# Altium PCB BH1750_VE6070-RS485.pcbdoc
Units mm, origin at the board's own origin, x right, y up, seen from the top; angles counter-clockwise.
Board outline 106.81 x 95.88 mm, 2 copper layers (Top Layer, Bottom Layer); 44 components, 46 nets, 133 pads, 69 vias.
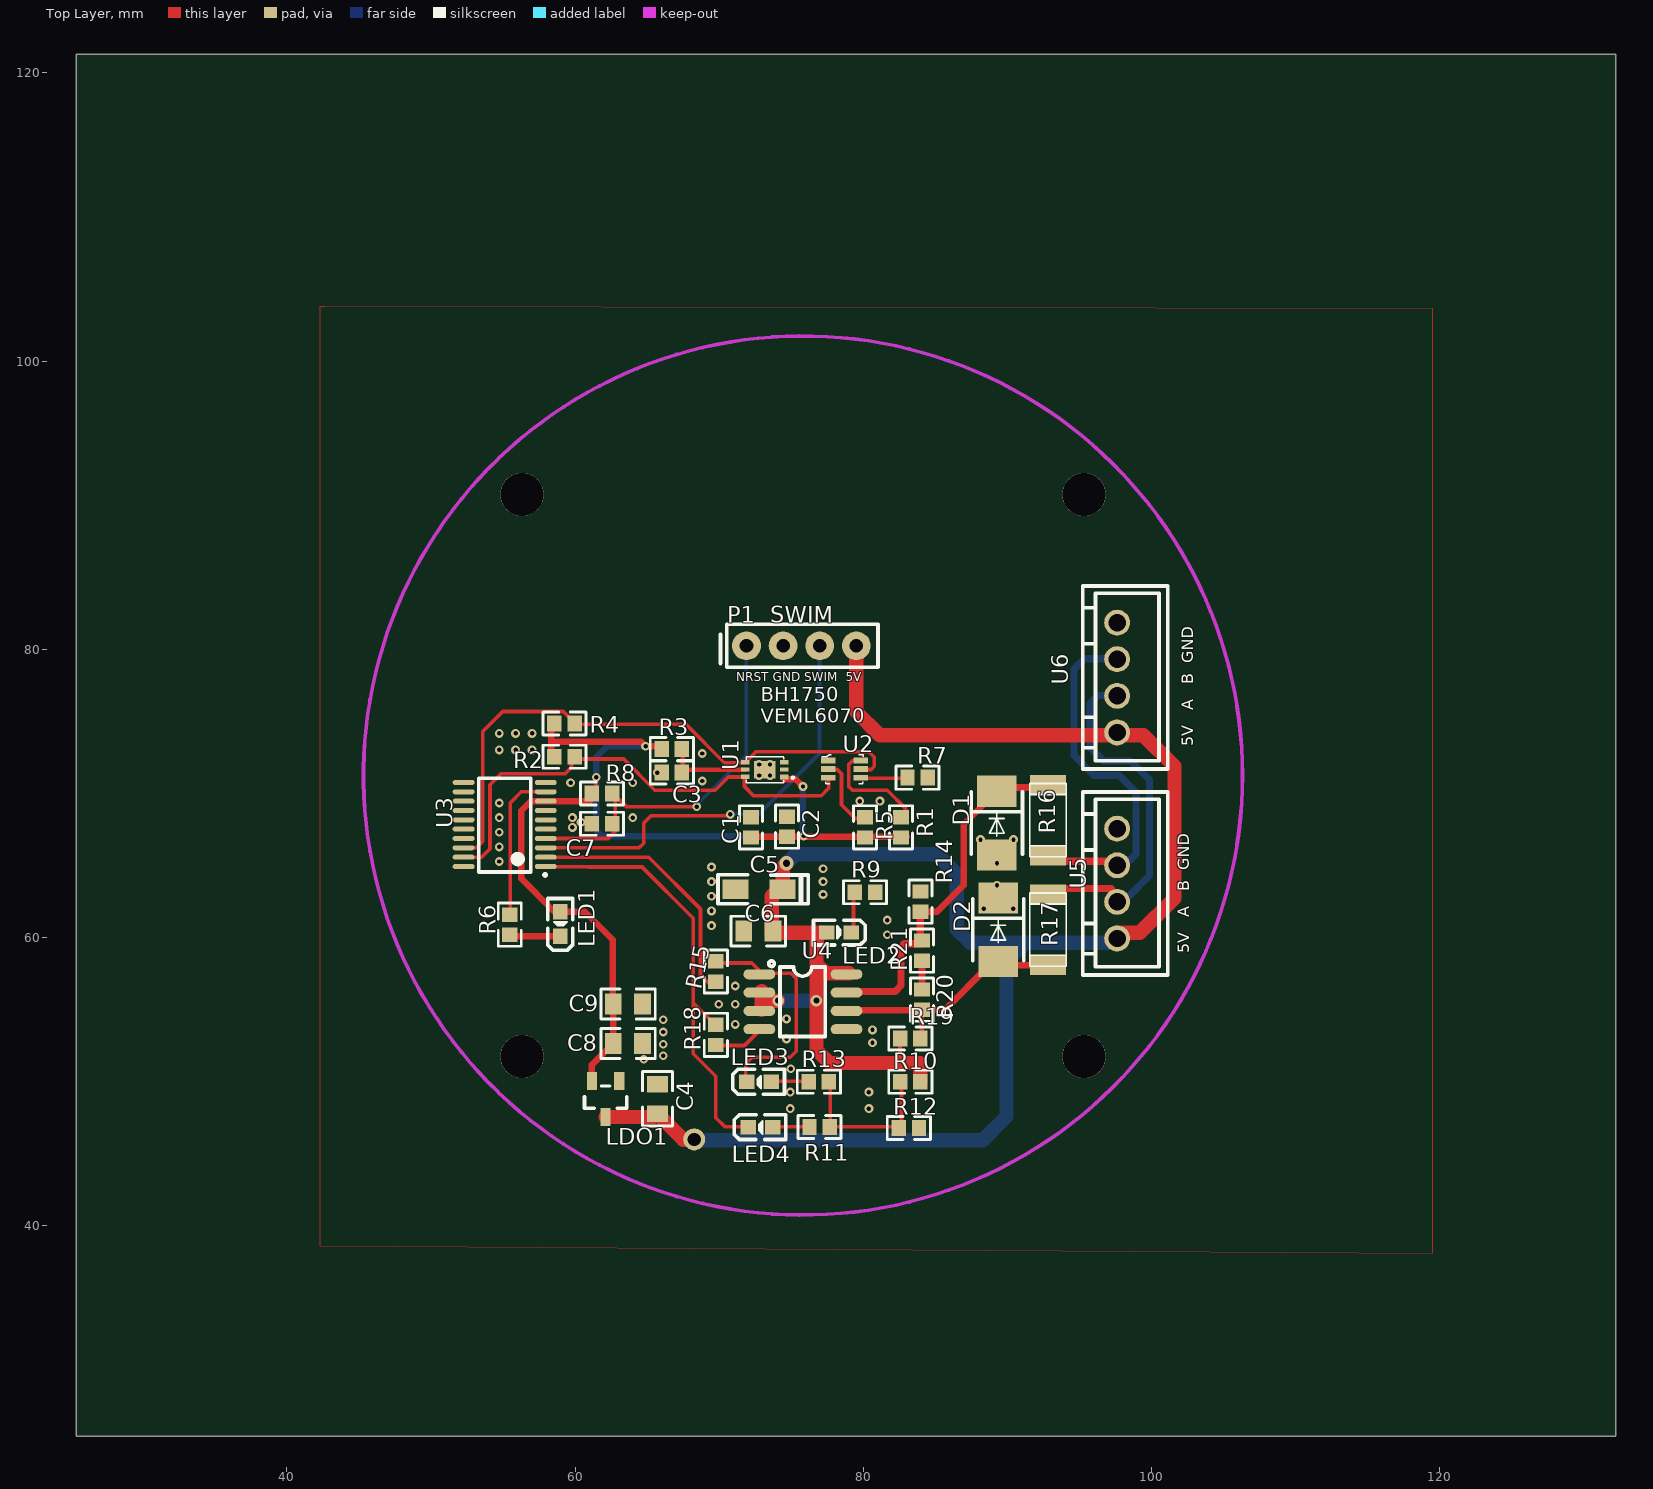
[diagram p0: Top Layer view]
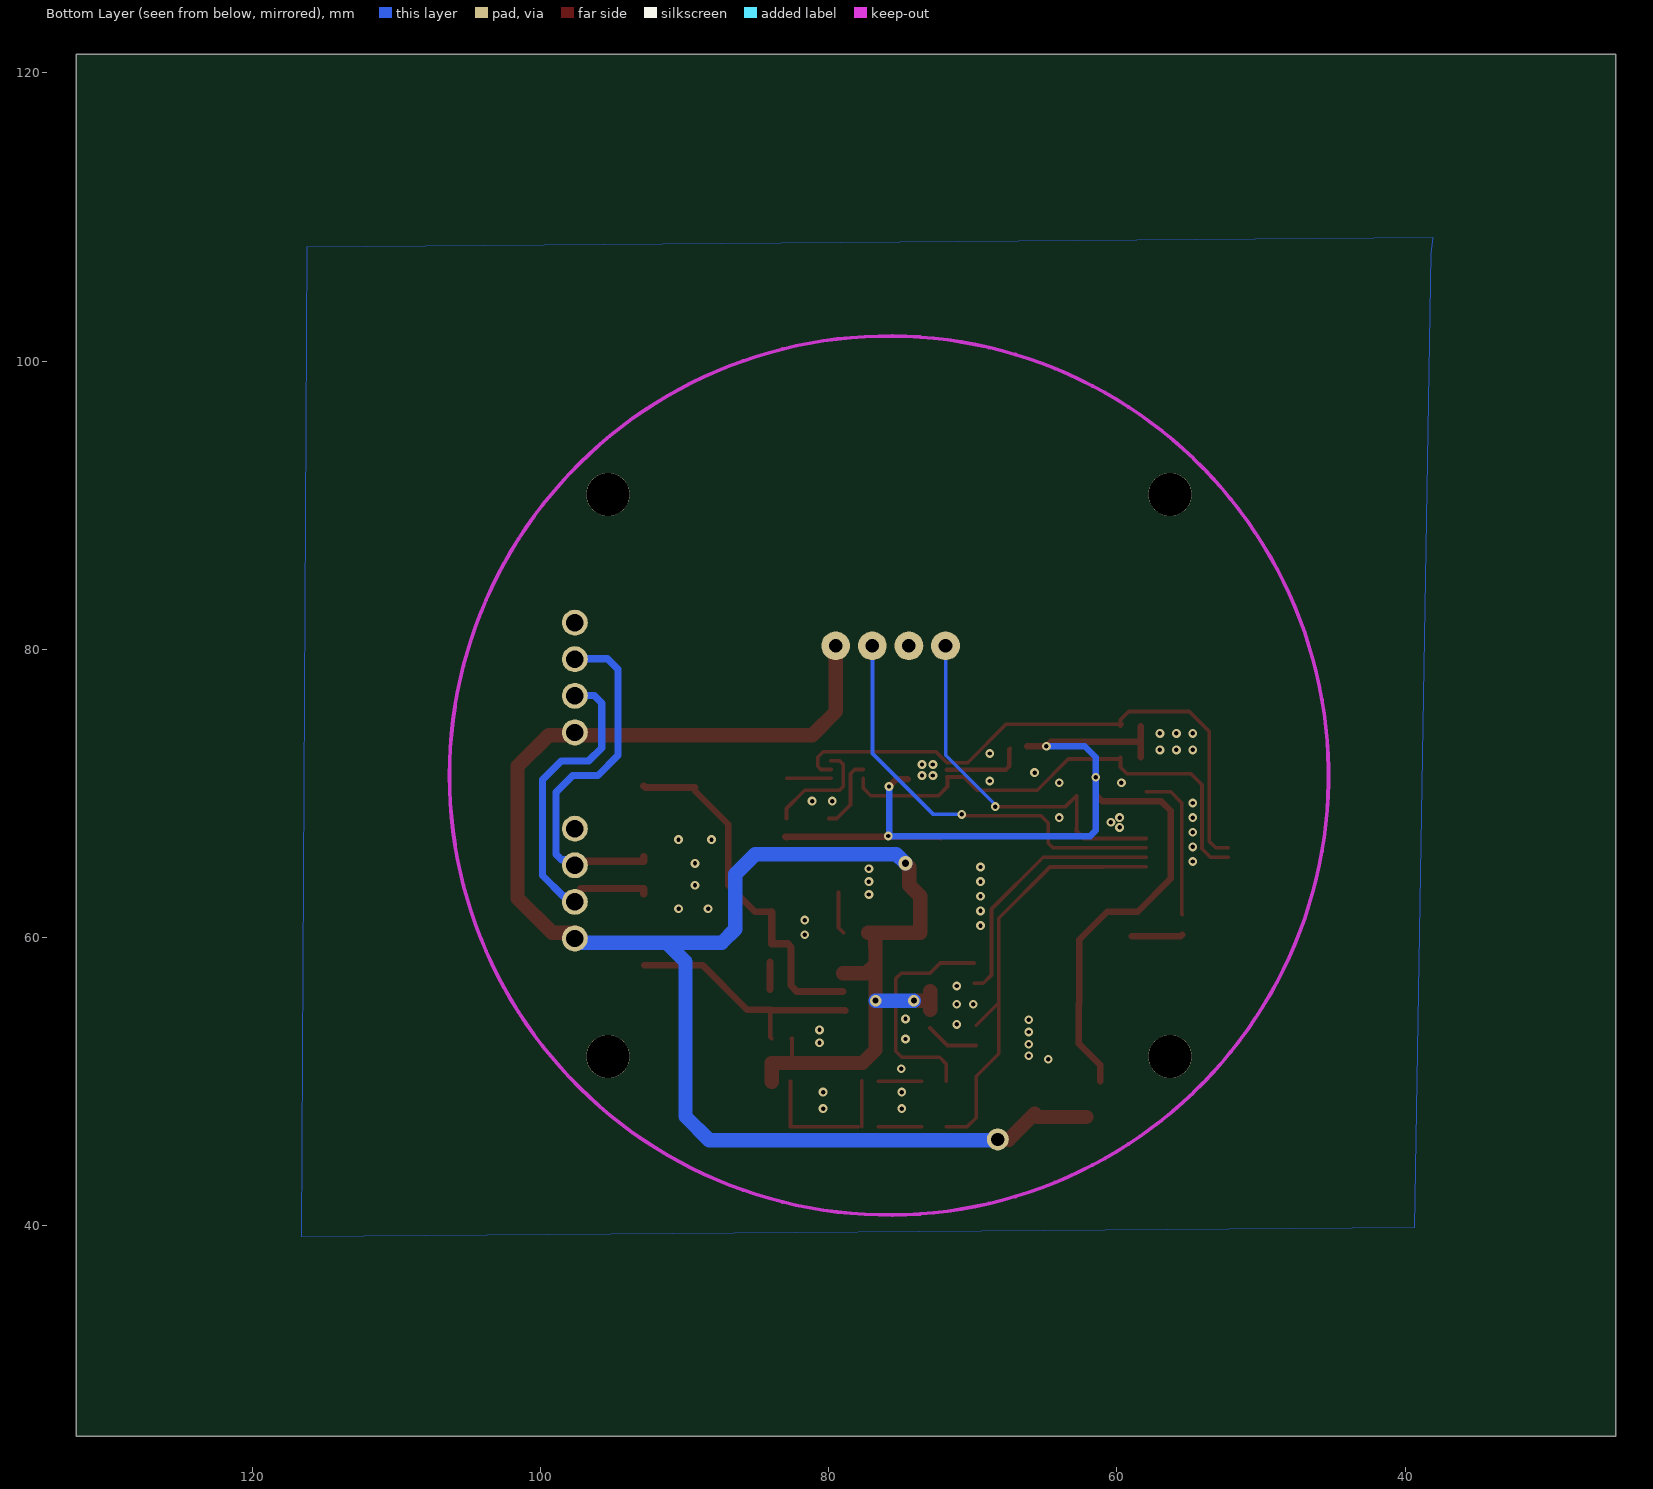
[diagram p1: Bottom Layer view, seen from below]

## Layer stack, top to bottom
Top Layer: signal copper (thickness not stored)
Dielectric: dielectric 0.32, FR-4, Dk 4.8
Bottom Layer: signal copper (thickness not stored)

## Board outline
132.207,25.4 25.4,25.4 25.4,121.285 132.207,121.285

## Components (designator, comment, footprint, x,y, rotation, side; value= is the part's Value field where it differs from the comment)
C1 "0.1uF" 0603 72.219,67.647 r90 top
C2 "10uF" 0603 74.719,67.697 r90 top
C3 "0.1uF" 0603 66.719,71.447 r180 top
C4 "1uF" 0805 65.719,48.797 r270 top
C5 "10uF" CASE-A_3216 72.769,63.347 r0 top
C6 "100nF" 0805 72.719,60.447 r0 top
C7 "100nF" 0603 61.869,67.897 r0 top
C8 "1uF" 0805 63.669,52.647 r180 top
C9 "100nF" 0805 63.669,55.397 r180 top
D1 "SMBJ6.8CA" SMB(DO-214AA) 89.269,67.947 r90 top
D2 "SMBJ6.8CA" SMB(DO-214AA) 89.369,60.547 r90 top
LDO1 "SC662K-3.3V" SOT-23(SOT-23-3) 62.119,48.797 r180 top
LED1 "19-213/Y2C-CQ2R2L/3T(CY)" LED-0603 58.969,60.947 r90 top
LED2 "19-217/GHC-YR1S2/3T" LED-0603 78.319,60.347 r180 top
LED3 "19-217/BHC-ZL1M2RY/3T" LED-0603 72.769,49.997 r0 top
LED4 "KT-0603R" LED-0603 72.869,46.847 r0 top
P1 "2.54mm/4p" "4P 2.54" 79.519,80.247 r180 top
R1 "10r" 0603 82.619,67.647 r270 top
R2 "4.7K" 0603 59.269,72.547 r180 top
R3 "1K" 0603 66.719,73.097 r0 top
R4 "4.7K" 0603 59.269,74.847 r180 top
R5 "10K" 0603 80.119,67.647 r270 top
R6 "1K" 0603 55.469,60.897 r270 top
R7 "270K" 0603 83.769,71.097 r0 top
R8 "1K" 0603 61.869,69.997 r180 top
R9 "1K" 0603 80.119,63.147 r180 top
R10 "470" 0603 83.269,49.997 r0 top
R11 "4.7K" 0603 76.969,46.847 r180 top
R12 "2K" 0603 83.169,46.797 r0 top
R13 "4.7K" 0603 76.919,49.997 r180 top
R14 "4.7K" 0603 83.969,62.497 r270 top
R15 "22" 0603 69.769,57.647 r90 top
R16 "10" 2010 92.819,68.147 r90 top
R17 "10" 2010 92.819,60.547 r270 top
R18 "22" 0603 69.769,53.247 r270 top
R19 "4.7K" 0603 83.269,52.997 r0 top
R20 "120" 0603 84.069,55.697 r270 top
R21 "NC" 0603 84.069,59.097 r90 top
U1 "BH1750FVI-TR" WSOF6I-7_L1.8-W2.6-H0.75-PITCH0.5-(EP)-BL 73.169,71.647 r90 top
U2 "VEML6070" 6SMD_MODULE 77.569,72.297 r0 top
U3 "STM8L051F3_JX" TSSOP-20_JX 55.119,67.847 r90 top
U4 "MAX13487EESA" SOIC-8_150MIL 75.819,55.547 r0 top
U5 "A2501WV-04P2" A2501WV-4P 97.619,63.747 r270 top
U6 "A2501WV-04P2" A2501WV-4P 97.619,78.047 r270 top

## Footprints (in the part's own frame and the unit in brackets; to place one, negate y for a bottom-side part, rotate by r counter-clockwise, add the part's x,y. Pads: shape width x height; smd on the part's side, far side on the other; paste and mask are expansions set on the pad)
"4P 2.54" [mm]
  round 2 hole 0.95: 1(0,0) 2(2.54,0) 3(5.08,0) 4(7.62,0)
  silkscreen extent -1.5,-1.5 9,1.5
6SMD_MODULE [mm]
  rect 1x0.4 smd: 1(0,0) 2(0,-0.6) 3(0,-1.2) 4(2.25,-1.2) 5(2.25,-0.6) 6(2.25,0)
  silkscreen extent -0.44,-1.62 2.42,0.4
0603 [mm]
  rect 1x1.1 smd: 1(-0.7,0) 2(0.7,0)
  silkscreen extent -1.5,-0.8 1.5,0.8
0805 [mm]
  rect 1.16x1.45 smd: 1(-1.016,0) 2(1.016,0)
  silkscreen extent -1.9,-1.03 1.87,1.04
2010 [mil]
  rect 55.1x98.4 smd: 1(-96.5,0) 2(96.5,0)
  silkscreen extent -100,-50 100,50
A2501WV-4P [mm]
  round 1.8 hole 1.2: 1(3.809,0.001) 2(1.269,0.001) 3(-1.271,0.001) 4(-3.809,-0.001)
  silkscreen extent -6.35,-2.38 6.35,3.5
CASE-A_3216 [mil]
  rect 71.5x53.5 smd: 1(64.5,0) 2(-64.5,0)
  silkscreen extent -112,-39 134,40
LED-0603 [mil]
  rect 43x39 smd: 1(33.5,0) 2(-33.5,0)
  silkscreen extent -72,-34 70,34
SMB(DO-214AA) [mil]
  rect 85x108 smd: 1(-87,0) 2(87,0)
  silkscreen extent -85,-70 85,70
SOIC-8_150MIL [mm]
  oval 2.2x0.7 smd: 1(-3.023,1.905) 2(-3.023,0.635) 3(-3.023,-0.635) 4(-3.023,-1.905) 5(3.023,-1.905) 6(3.023,-0.635) 7(3.023,0.635) 8(3.023,1.905)
  silkscreen extent -2.37,-2.41 1.55,2.83
SOT-23(SOT-23-3) [mm]
  rect 0.7x1.25 smd: 1(-0.95,-1.25) 2(0.95,-1.25) 3(0,1.25)
  silkscreen extent -1.46,-0.9 1.46,0.65
TSSOP-20_JX [mm]
  oval 0.35x1.52 smd: 1(-2.921,-2.85) 2(-2.271,-2.85) 3(-1.621,-2.85) 4(-0.97,-2.85) 5(-0.32,-2.85) 6(0.32,-2.85) 7(0.97,-2.85) 8(1.621,-2.85) 9(2.271,-2.85) 10(2.921,-2.85) 11(2.921,2.85) 12(2.268,2.85) 13(1.621,2.85) 14(0.97,2.85) 15(0.323,2.85) 16(-0.318,2.85) 17(-0.968,2.85) 18(-1.615,2.85) 19(-2.266,2.85) 20(-2.921,2.85)
  silkscreen extent -3.6,-2.9 3.2,1.8
WSOF6I-7_L1.8-W2.6-H0.75-PITCH0.5-(EP)-BL [mm]
  rect 0.351x0.599 smd: 1(-0.511,-1.35)
  rect 0.3x0.6 smd: 2(0.01,-1.35) 3(0.511,-1.35)
  rect 0.3x0.599 smd: 4(0.51,1.35) 5(0.01,1.35) 6(-0.49,1.35)
  rect 1.2x1.5 smd: 7(0,0)
  silkscreen extent -0.9,-1.99 0.9,1.3

## Free pads (board coordinates)
  round 1.524 hole 0.914: 1(68.269,45.997)
  round 3 hole 3 unplated: ""(56.319,51.747) ""(56.319,90.747) ""(95.319,51.747) ""(95.319,90.747)

## Via types
v1: diameter 0.612, hole 0.305, Top Layer to Bottom Layer, 60 vias
v2: diameter 0.61, hole 0.305, Top Layer to Bottom Layer, 6 vias
v3: diameter 0.8, hole 0.4, Top Layer to Bottom Layer, 2 vias
v4: diameter 1, hole 0.5, Top Layer to Bottom Layer, 1 vias

## Nets (pads, with @x,y where several pads share a name; then routed paths per layer and width w, separated by ;. In a path a pad name is that pad's centre, name@x,y a point inside that pad or via, vN(x,y) a via of type N, cw(c..) or ccw(c..) an arc to the next point about the centre after c; other vN are vias at no path point)
3.3V: C1.1 C2.1 C8.2 C9.2 LDO1.2 LED1.1 R1.2 R2.2 R3.1 R4.2 R5.2 R8.2 U1.1 U3.8 | length 79.6
  Top Layer w0.254: R8.2@61.403,69.85 61.468,69.915 v2(61.468,71.12)
  Top Layer w0.45: U3.8 56.939,69.466 56.269,68.796 56.269,64.097 58.567,61.798 LED1.1 60.668,61.798 62.619,59.847 62.619,55.431 C9.2 C8.2 61.169,51.163 LDO1.2 ; U3.8 61.021,69.467 R8.2@61.403,69.85 ; R2.2@58.355,72.517 R4.2@58.355,74.676 ; 58.355,73.594 64.582,73.594 v2(64.897,73.279) R3.1@66.229,73.279 ; C1.1 72.219,66.997 83.005,66.997 R1.2@82.928,66.947 ; U1.1@74.502,70.993 75.311,70.993 v2(75.819,70.485)
  Bottom Layer w0.45: v2(64.897,73.279) 62.23,73.279 61.468,72.517 v2(61.468,71.12) 61.468,67.437 61.858,67.047 v2(75.869,67.047) 75.819,67.097 v2(75.819,70.485)
+5V: C4.2 C5.1 C6.2 LDO1.3 LED2.1 P1.1 pad.1 R10.2 R19.1 U4.2 U4.3 U4.8 U5.1 U6.1 | length 151.3
  Top Layer w0.254: U6.1 97.817,74.041 99.441,74.041
  Top Layer w0.3: 82.548,51.298 82.548,52.976 R19.1
  Top Layer w1: LDO1.3 65.485,47.547 C4.2 67.523,45.977 pad.1@68.119,45.977 ; U4.3@72.97,54.994 U4.2@72.97,56.264 ; 72.97,55.63 72.972,55.629 v3(74.088,55.629) ; v4(74.676,65.151) 74.409,64.884 74.409,63.627 73.66,62.878 73.66,60.325 LED2.1@77.254,60.325 ; v3(76.755,55.629) 76.754,52.2 77.658,51.298 83.969,51.297 83.969,51.147 R10.2 ; v3(76.755,55.629) 76.755,58.423 ; 76.762,60.325 76.754,58.169 77.389,57.534 U4.8@79.014,57.534 ; P1.1@79.502,80.137 79.502,75.692 81.153,74.041 98.697,74.041 ; U6.1@97.5,74.295 97.5,74.041 99.441,74.041 101.6,71.882 101.6,62.738 99.187,60.325 U5.1@97.536,60.325
  Bottom Layer w1: pad.1@68.118,45.977 68.156,45.938 88.29,45.938 89.941,47.589 89.941,58.318 91.277,59.654 ; v3(74.088,55.629) v3(76.755,55.629) ; v4(74.676,65.151) 75.311,65.786 82.423,65.786 85.09,65.786 86.487,64.389 86.487,60.579 87.412,59.654 91.277,59.654 ; U5.1@97.889,59.654 91.277,59.654
GND: C1.2 C2.2 C3.2 C4.1 C5.2 C6.1 C7.1 C8.1 C9.1 D1.1 D2.2 LDO1.1 P1.3 R7.2 R9.1 R12.2 R14.1 U1.2 U1.3 U1.7 U2.1 U3.7 U4.5 U5.4 U6.4
  other v1: 74.93,48.133 80.391,48.133 74.93,49.276 80.391,49.276 74.969,50.897 64.77,51.562 66.119,51.797 66.119,52.597 80.645,52.705 74.676,52.959 66.119,53.447 80.645,53.594 71.12,53.975 66.119,54.297 74.676,54.356 69.977,55.372 71.12,55.372 71.12,56.642 81.661,60.198 69.469,60.833 81.661,61.214 69.469,61.849 88.369,61.997 90.419,61.997 69.469,62.865 77.216,62.992 89.281,63.627 69.469,63.881 77.216,63.881 77.216,64.77 69.469,64.897 89.281,65.151 54.737,65.278 54.737,66.294 88.138,66.802 90.424,66.802 54.737,67.31 59.819,67.647 60.419,67.997 54.737,68.326 59.817,68.326 64.008,68.326 54.737,69.342 79.756,69.469 81.153,69.469 59.69,70.739 64.008,70.739 68.834,70.866 72.771,71.247 73.533,71.247 65.719,71.447 72.771,72.009 73.533,72.009 68.834,72.771 54.737,73.025 55.88,73.025 57.023,73.025 54.737,74.168 55.88,74.168 57.023,74.168
NRST: C7.2 P1.4 R8.1 U3.4 | length 26
  Top Layer w0.254: U3.4 62.289,66.877 62.81,67.397 C7.2@62.804,67.564 ; C7.2@62.803,67.564 R8.1@62.803,69.85 ; R8.1@62.804,69.85 63.566,69.088 v2@68.473,69.088
  Bottom Layer w0.254: v2(68.453,69.088) 68.453,69.215 71.882,72.644 P1.4@71.882,80.137
OSC_IN: U3.5
OSC_OUT: U3.6
PB0: U3.10
PB1: U3.11
PB2: U3.12
PB3: U3.13
PC4: U3.20
PD0: R6.1 U3.9 | length 10.5
  Top Layer w0.254: R6.1 55.499,61.627 55.499,69.342 56.275,70.118 U3.9
R6_2: LED1.2 R6.2 | length 3.5
  Top Layer w0.45: R6.2 55.57,60.096 LED1.2
R9_2: LED2.2 R9.2 | length 3
  Top Layer w0.254: LED2.2@78.956,60.325 79.319,60.688 R9.2@79.319,63.147
R11_2: LED4.1 R11.2 | length 3
  Top Layer w0.254: LED4.1@73.542,46.866 R11.2@76.563,46.866
R13_1: R10.1 R11.1 R12.1 R13.1 | length 11
  Top Layer w0.254: R11.1@77.719,46.873 R13.1@77.719,50.048 ; R11.1@77.963,46.866 82.659,46.866 R10.1@82.659,50.041
R13_2: LED3.1 R13.2 | length 3
  Top Layer w0.254: LED3.1@73.542,50.041 R13.2@76.563,50.041
R16_1: R16.1 U5.3 U6.3 | length 25.8
  Top Layer w0.5: R16.1@92.837,65.621 92.837,65.296 97.645,65.296 U5.3@97.536,65.405
  Bottom Layer w0.5: U5.3@97.536,65.405 98.552,65.405 98.933,65.786 98.933,70.084 97.77,71.247 96.02,71.247 94.62,72.647 94.62,78.618 95.349,79.347 97.544,79.347 U6.3
R17_1: R17.1 U5.2 U6.2 | length 25.5
  Top Layer w0.5: R17.1@92.837,63.03 92.837,63.396 97.208,63.396 U5.2
  Bottom Layer w0.5: U5.2@97.536,62.865 98.425,62.865 99.868,64.308 99.868,70.947 98.552,72.263 96.647,72.263 95.758,73.152 95.758,76.286 96.269,76.797 U6.2
R20_1: R20.1 R21.1 | length 1.9
  Top Layer w0.5: R20.1 R21.1@84.069,58.297
S$18: 
S$20: 
S$24: 
S$26: 
S$28: 
S$30: 
S$67: 
S$69: 
S$714: 
SCL: R2.1 U1.6 U2.3 U3.19 | length 34.4
  Top Layer w0.254: U3.19 53.516,65.581 53.975,66.04 54.102,66.167 54.102,70.612 54.864,71.374 58.674,71.374 59.309,71.374 59.755,71.82 R2.1@59.755,72.517 ; R2.1@59.756,72.517 59.883,72.39 63.373,72.39 65.532,70.231 69.723,70.231 70.63,71.138 U1.6@71.801,71.138 ; U1.6@71.802,71.138 71.755,71.091 71.755,70.485 72.39,69.85 77.089,69.85 77.597,70.358 U2.3@77.597,71.063
SDA: R4.1 U1.4 U2.5 U3.18 | length 41.1
  Top Layer w0.254: U3.18 53.151,66.232 53.594,66.675 53.594,74.295 54.991,75.692 59.182,75.692 59.756,75.118 59.756,74.676 59.634,74.798 67.696,74.798 70.355,72.139 U1.4@71.801,72.139 ; U1.4@71.802,72.138 72.562,72.898 79.502,72.898 80.391,72.898 80.772,72.517 80.772,71.882 80.553,71.663 U2.5@79.847,71.663
SPI1_MISO: U3.17
SPI1_MOSI: U3.16
SPI1_NSS: U3.14
SPI_SCK: U3.15
SWIM: P1.2 U3.3 | length 29.9
  Top Layer w0.254: U3.3 64.447,66.225 64.77,66.548 64.77,67.945 65.273,68.448 70.769,68.448 v2(70.769,68.547)
  Bottom Layer w0.254: v2(70.769,68.547) 72.738,68.547 76.962,72.771 P1.2@76.962,80.137
U1_5: C3.1 R3.2 U1.5 | length 5.7
  Top Layer w0.3: R3.2 67.47,73.048 67.47,71.897 67.709,71.656 U1.5
U2_2: R5.1 U2.2 | length 5.1
  Top Layer w0.254: U2.2@77.597,71.663 78.197,71.663 78.359,71.501 78.486,71.374 78.486,69.215 79.437,68.264 R5.1@80.01,68.264
U2_4: R7.1 U2.4 | length 3.1
  Top Layer w0.254: U2.4@79.847,71.064 R7.1@82.926,71.064
U2_6: R1.1 U2.6 | length 7.7
  Top Layer w0.254: U2.6@79.847,72.263 79.248,72.263 78.994,72.009 78.994,70.485 79.248,70.231 81.661,70.231 82.931,68.961 R1.1@82.931,68.265
U4_1: LED3.2 R15.2 U4.1 | length 16
  Top Layer w0.254: R15.2@69.897,58.234 72.27,58.234 U4.1@72.97,57.534 ; LED3.2@71.839,50.041 71.839,51.222 72.306,51.689 74.93,51.689 75.357,52.116 75.357,57.153 74.976,57.534 U4.1@72.969,57.534
U4_4: R18.2 U4.4 | length 3.7
  Top Layer w0.254: R18.2@69.77,52.516 71.762,52.516 U4.4@72.97,53.724
U4_6: D2.1 R17.2 R19.2 R20.2 U4.6 | length 17.6
  Top Layer w0.3: R19.2 84.069,53.097 R20.2
  Top Layer w0.45: U4.6 78.842,54.948 84.173,54.948 R20.2 ; R20.2 85.669,54.997 88.768,58.096 R17.2
U4_7: D1.2 R14.2 R16.2 R21.2 U4.7 | length 26.2
  Top Layer w0.254: R14.2@83.97,61.796 83.97,61.801 R14.2@84.018,61.798
  Top Layer w0.45: R14.2 85.118,61.798 86.97,63.647 86.97,67.856 D1.2
  Top Layer w0.5: U4.7@79.014,56.264 82.215,56.264 82.619,56.667 82.619,58.423 ; 82.619,57.185 82.619,59.334 82.85,59.566 83.95,59.566 83.95,61.777 R14.2 ; D1.2@89.281,70.409 92.723,70.409 R16.2@92.837,70.523
USART_RX: R15.1 U3.2 | length 18.2
  Top Layer w0.254: U3.2 65.107,65.576 68.707,61.976 68.707,57.404 69.278,56.832 R15.1@69.896,56.832
USART_TX: LED4.2 R18.1 U3.1 | length 31.4
  Top Layer w0.254: U3.1 61.105,64.926 61.134,64.897 ; 60.929,64.897 64.643,64.897 68.199,61.341 68.199,55.486 R18.1@69.769,53.916 ; 68.199,53.759 68.199,55.755 ; 68.199,53.917 68.199,51.943 69.769,50.373 69.769,47.501 70.404,46.866 LED4.2@71.839,46.866

## Polygon pours and split planes (outlines as drawn)
GND on Bottom Layer (solid): 38.227,107.442 39.37,39.878 116.586,39.243 116.205,107.95 38.1,108.585
GND on Top Layer (solid): 42.291,103.759 42.291,38.608 119.507,38.1 119.507,103.632 42.672,103.759

## Keep-outs
Keep-Out Layer:
  circle w0.254: c75.819,71.247 r30.5

## Silkscreen, mask and mechanical layers (free items; w line width, h text height)
Top Overlay:
  lines w0.3 net S$714: 70.101,79.029 70.101,81.03
  text "SWIM" at 73.533,81.863 h1.14
  text "NRST GND SWIM  5V" at 71.201,77.802 h0.6
  text "BH1750 / VEML6070" at 72.898,74.9 h1
  text "5V   A   B  GND" at 102.889,73.279 h0.8 r90
  text "5V   A   B  GND" at 102.635,58.928 h0.8 r90

## Text inside footprints (layer, text, board x,y; h text height)
U2: Document "REF" at 78.094,71.447 h0.5